# EAGLE board motor control ahkad (1) (EAGLE 9.7.0)

Size 293.63 x 185.42 mm. Coordinates in mm from the lower left corner, seen from the top.
Outline: 0,0 293.63,0 293.63,185.42 0,185.42 0,0
Copper layers (1*16): Top 0.035mm / dielectric 1.5mm / Bottom 0.035mm
Design rules "default": minimum track width 6mil, minimum drill 0.35mm, track to track 6mil, track to pad 6mil, pad to pad 6mil, via to via 6mil, smd to smd 6mil, copper to edge 40mil, drill to drill 6mil, minimum pad ring 10mil, minimum via ring 8mil, stop-mask expansion 4mil, vias tented up to drill 0mil, thermal gap 10mil

## Footprints (pad centres in the part's own frame; a part is rotated, then mirrored left to right if it is on the bottom)
BATTERY-GENERIC = drill 1.118 pad 3.15 octagon: + 2.54,0; - -2.54,0
DIODE-AXIAL = drill 1: 1 -5.08,0; 2 5.08,0
LEDRD254W60D565H860B = drill 0.981 pad 1.581: 1 -1.27,0; 2 1.27,0
MOTOR = drill 1.118 pad 3.15 octagon: + 2.54,0; - -2.54,0
RESAD1016W63L850D250B = drill 0.83 pad 1.43: 1 -5.08,0; 2 5.08,0
TO92 = drill 0.813 octagon: 1 -1.27,0; 2 0,1.905; 3 1.27,0
ARDUINO-UNO-R3-SHIELD = drill 1.016 pad 1.88: 3.3V 24.13,-2.54; 5V 24.13,0; A0 24.13,12.7; A1 24.13,15.24; A2 24.13,17.78; A3 24.13,20.32; A4 24.13,22.86; A5 24.13,25.4; AREF -24.13,-13.97; D2 -24.13,20.32; D3 -24.13,17.78; D4 -24.13,15.24; D5 -24.13,12.7; D6 -24.13,10.16; D7 -24.13,7.62; D8 -24.13,3.81; D9 -24.13,1.27; D10 -24.13,-1.27; D11 -24.13,-3.81; D12 -24.13,-6.35; D13 -24.13,-8.89; GND@0 24.13,2.54; GND@1 24.13,5.08; GND@2 -24.13,-11.43; IOREF 24.13,-7.62; NC 24.13,-10.16; RES 24.13,-5.08; RX -24.13,25.4; SCL -24.13,-19.05; SDA -24.13,-16.51; TX -24.13,22.86; VIN 24.13,7.62
DIP762W53P254L1969H508Q16B = drill 0.743 pad 1.343: 1 -3.81,8.89; 2 -3.81,6.35; 3 -3.81,3.81; 4 -3.81,1.27; 5 -3.81,-1.27; 6 -3.81,-3.81; 7 -3.81,-6.35; 8 -3.81,-8.89; 9 3.81,-8.89; 10 3.81,-6.35; 11 3.81,-3.81; 12 3.81,-1.27; 13 3.81,1.27; 14 3.81,3.81; 15 3.81,6.35; 16 3.81,8.89

## Placement (x,y rotation side)
BAT2  9V  [BATTERY-GENERIC]  36.21,108.05 270 top
D1  DIODEDIODE-AXIAL  [DIODE-AXIAL]  157.66,90.33 0 top
D2  DIODEDIODE-AXIAL  [DIODE-AXIAL]  157.91,30.91 0 top
D3  DIODEDIODE-AXIAL  [DIODE-AXIAL]  246.56,80.17 270 top
D4  RED  [LEDRD254W60D565H860B]  138.61,85.25 180 top
D5  RED  [LEDRD254W60D565H860B]  177.49,78.9 270 top
D6  RED  [LEDRD254W60D565H860B]  195.27,78.9 270 top
D7  RED  [LEDRD254W60D565H860B]  218.13,78.9 270 top
D8  RED  [LEDRD254W60D565H860B]  233.37,78.9 270 top
D9  RED  [LEDRD254W60D565H860B]  177.74,19.48 270 top
D10  RED  [LEDRD254W60D565H860B]  195.52,19.48 270 top
D11  RED  [LEDRD254W60D565H860B]  218.38,19.48 270 top
D12  RED  [LEDRD254W60D565H860B]  233.62,19.48 270 top
D13  RED  [LEDRD254W60D565H860B]  138.61,67.47 180 top
D14  RED  [LEDRD254W60D565H860B]  138.86,25.83 180 top
D15  RED  [LEDRD254W60D565H860B]  138.86,8.05 180 top
M3  MOTOR_HDR  [MOTOR]  173.84,109.76 0 top
M4  MOTOR_HDR  [MOTOR]  271.4,109.6 0 top
R1  0.2k  [RESAD1016W63L850D250B]  256.97,38.53 90 top
R2  1k  [RESAD1016W63L850D250B]  261.8,64.93 0 top
R3  k  [RESAD1016W63L850D250B]  284.66,64.93 0 top
R4  0.2k  [RESAD1016W63L850D250B]  177.98,85.25 90 top
R5  1k  [RESAD1016W63L850D250B]  195.76,85.25 90 top
R6  1k  [RESAD1016W63L850D250B]  218.62,85.25 90 top
R7  1k  [RESAD1016W63L850D250B]  233.86,85.25 90 top
R8  0.2k  [RESAD1016W63L850D250B]  178.23,25.83 90 top
R9  1k  [RESAD1016W63L850D250B]  196.01,25.83 90 top
R10  1k  [RESAD1016W63L850D250B]  218.87,25.83 90 top
R11  1k  [RESAD1016W63L850D250B]  234.11,25.83 90 top
R12  0.2k  [RESAD1016W63L850D250B]  134.34,89.58 90 top
R13  0.2k  [RESAD1016W63L850D250B]  134.34,71.8 90 top
R14  0.2k  [RESAD1016W63L850D250B]  134.59,30.15 90 top
R15  0.2k  [RESAD1016W63L850D250B]  134.59,12.37 90 top
T1  NPN  [TO92]  277.29,33.45 0 top
U1  ARDUINO-UNO-R3-SHIELD  [ARDUINO-UNO-R3-SHIELD]  47.88,155.58 270 top
U2  L293E  [DIP762W53P254L1969H508Q16B]  273.23,81.44 270 top
U4  L293E  [DIP762W53P254L1969H508Q16B]  71.68,88.82 270 top

## Library data of the parts
BAT2 D1-D3 M3 M4 R1-R15 U1 U2 U4 = Tinkercad
D4-D15 = Tinkercad; CATEGORY: Opto-Electronic; SUB-CATEGORY: LED; VALUE: LED_RED
T1 = Tinkercad; CATEGORY: Transistor; SUB-CATEGORY: BJT; TYPE: NPN

## Nets
BAT2+: BAT2.+ U4.8
BAT2-: BAT2.- D3.2 R12.1 R13.1 R14.1 R15.1 U1.GND@0 U1.GND@1 U1.GND@2 U4.4 U4.5 U4.12 U4.13
D4_C: D4.2 R12.2
D5_A: D5.1 R4.1
D6_A: D6.1 R5.1
D7_A: D7.1 R6.1
D8_A: D8.1 R7.1
D9_A: D9.1 R8.1
D10_A: D10.1 R9.1
D11_A: D11.1 R10.1
D12_A: D12.1 R11.1
D13_C: D13.2 R13.2
D14_C: D14.2 R14.2
D15_C: D15.2 R15.2
M3_+: D9.2 D10.2 D11.2 D12.2 M3.+ U4.11
M3_-: D5.2 D6.2 D7.2 D8.2 M3.- U4.3
M4_+: M4.+ U2.3
M4_-: M4.- U2.6
R1_1: D2.2 R1.1 R8.2 R9.2 R10.2 R11.2
T1_B: R1.2 T1.2
U1_5V: U1.5V U4.1 U4.9 U4.16
U1_D2: D13.1 U1.D2 U4.2
U1_D3: D14.1 U1.D3 U4.15
U1_D4: D15.1 U1.D4 U4.10
U1_TX: D4.1 U1.TX U4.7
U2_1A: R3.1 U2.2
U2_2A: R2.2 U2.7
U2_GND1: D3.1 R2.1 U2.4 U2.5
U2_VCC2: D1.2 R3.2 R4.2 R5.2 R6.2 R7.2 U2.1 U2.8 U2.16
U4_2Y: D1.1 U4.6
U4_4Y: D2.1 U4.14

## Tracks (layer width: path | path; a pad name or v marks a point on that pad's centre or on a via)
BAT2+  (1 unrouted)
BAT2-  (12 unrouted)
D4_C  (1 unrouted)
D5_A  (1 unrouted)
D6_A  (1 unrouted)
D7_A  (1 unrouted)
D8_A  (1 unrouted)
D9_A  (1 unrouted)
D10_A  (1 unrouted)
D11_A  (1 unrouted)
D12_A  (1 unrouted)
D13_C  (1 unrouted)
D14_C  (1 unrouted)
D15_C  (1 unrouted)
M3_+  (5 unrouted)
M3_-  (5 unrouted)
M4_+  (1 unrouted)
M4_-  (1 unrouted)
R1_1  (5 unrouted)
T1_B  (1 unrouted)
U1_5V  (3 unrouted)
U1_D2  (2 unrouted)
U1_D3  (2 unrouted)
U1_D4  (2 unrouted)
U1_TX  (2 unrouted)
U2_1A  (1 unrouted)
U2_2A  (1 unrouted)
U2_GND1  (3 unrouted)
U2_VCC2  (8 unrouted)
U4_2Y  (1 unrouted)
U4_4Y  (1 unrouted)